# EAGLE board veter-cap (EAGLE 6.3)
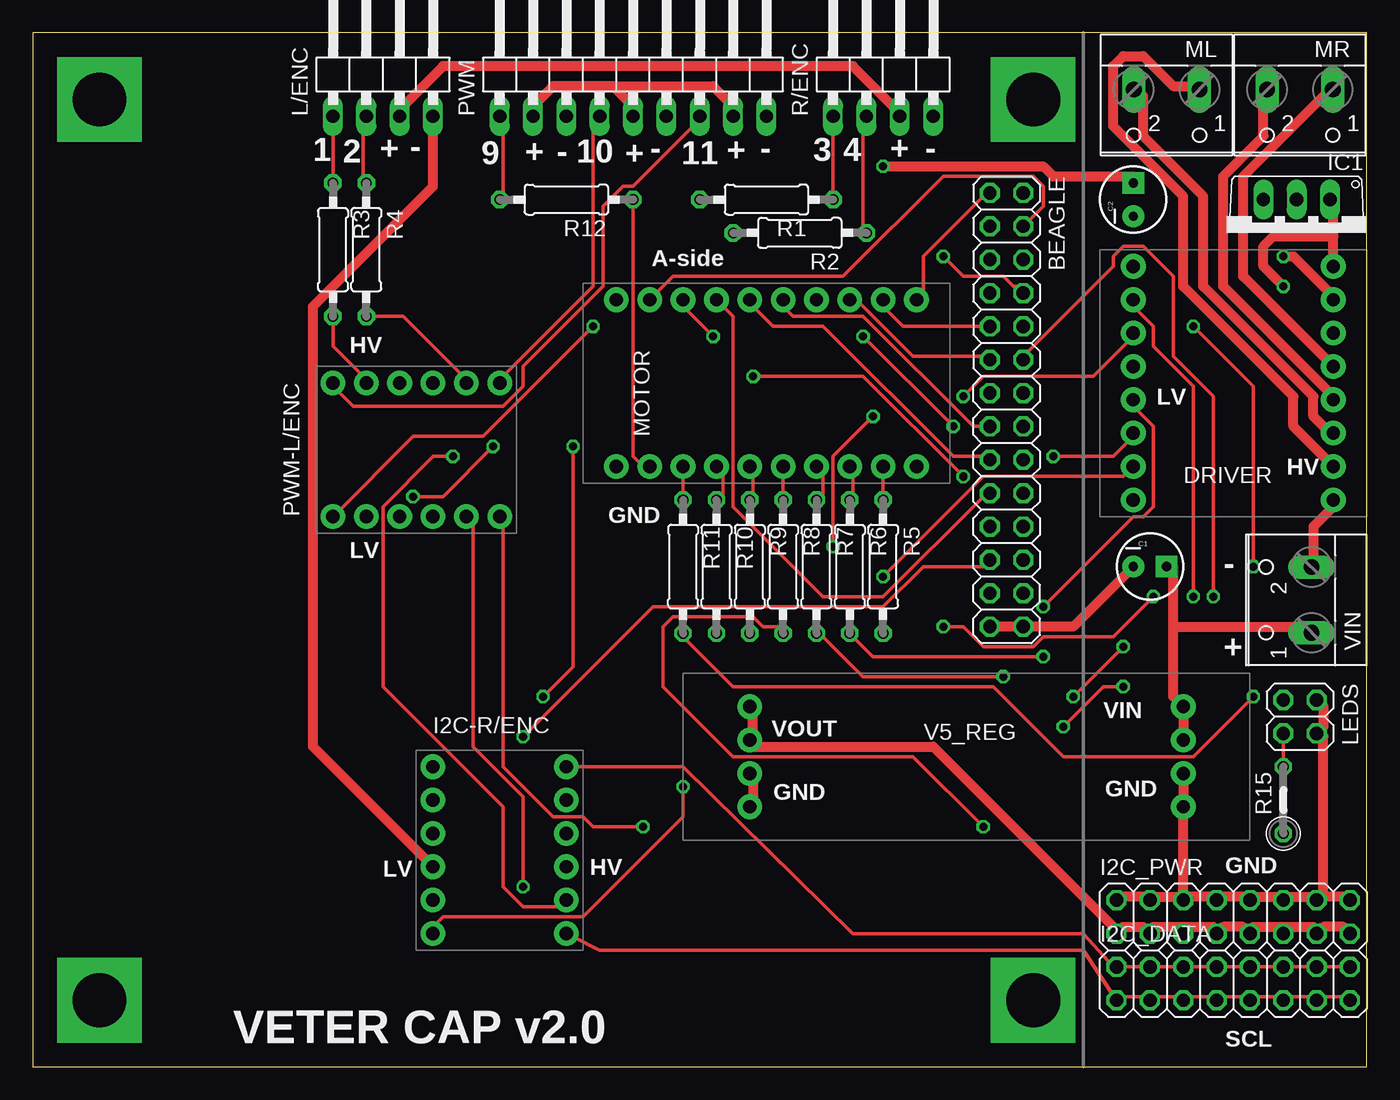
[diagram p0: board, top side]
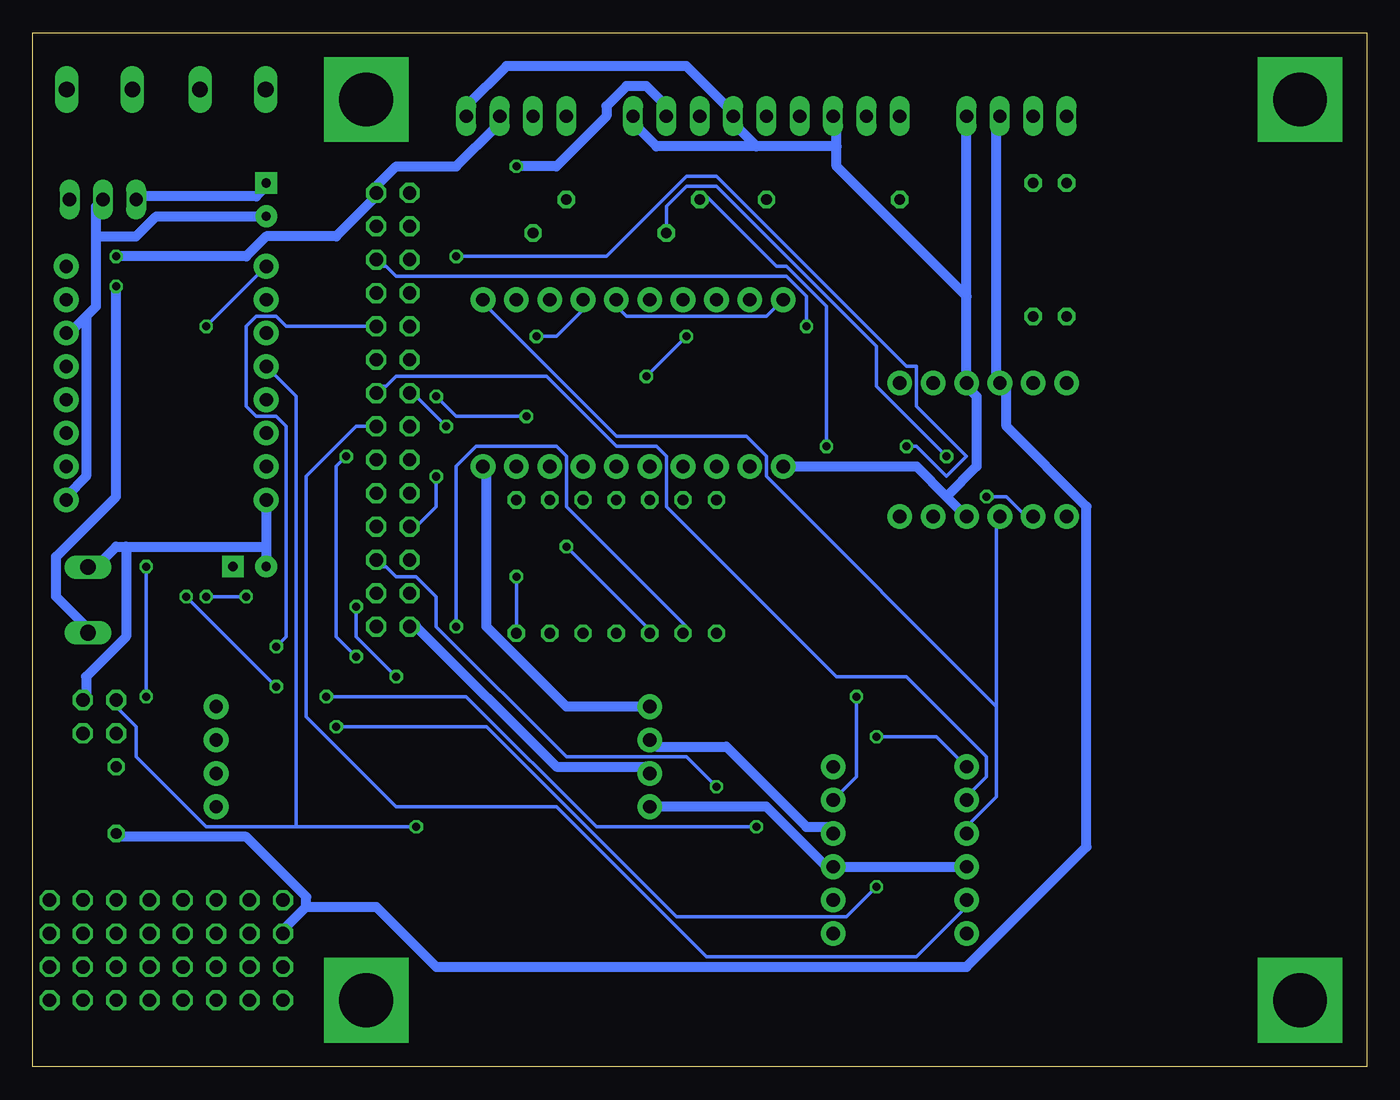
[diagram p1: board, bottom side, seen from below]

Size 101.6 x 78.74 mm. Coordinates in mm from the lower left corner, seen from the top.
Outline: 0,0 101.6,0 101.6,78.74 0,78.74 0,0
Copper layers (1*16): Top 0.035mm / dielectric 1.5mm / Bottom 0.035mm
Design rules "default": minimum track width 10mil, minimum drill 24mil, track to track 8mil, track to pad 8mil, pad to pad 8mil, via to via 8mil, smd to smd 8mil, copper to edge 40mil, drill to drill 12mil, minimum pad ring 10mil, minimum via ring 8mil, stop-mask expansion 4mil, vias tented up to drill 0mil, thermal gap 10mil
Net classes: 0 default: width 0.254 mm; 1 Supply: width 0.762 mm

## Footprints (pad centres in the part's own frame; a part is rotated, then mirrored left to right if it is on the bottom)
2X14 = drill 1.016 octagon: 1 -16.51,-1.27; 2 -16.51,1.27; 3 -13.97,-1.27; 4 -13.97,1.27; 5 -11.43,-1.27; 6 -11.43,1.27; 7 -8.89,-1.27; 8 -8.89,1.27; 9 -6.35,-1.27; 10 -6.35,1.27; 11 -3.81,-1.27; 12 -3.81,1.27; 13 -1.27,-1.27; 14 -1.27,1.27; 15 1.27,-1.27; 16 1.27,1.27; 17 3.81,-1.27; 18 3.81,1.27; 19 6.35,-1.27; 20 6.35,1.27; 21 8.89,-1.27; 22 8.89,1.27; 23 11.43,-1.27; 24 11.43,1.27; 25 13.97,-1.27; 26 13.97,1.27; 27 16.51,-1.27; 28 16.51,1.27
CPOL-RADIAL-10UF-25V = drill 0.7 pad 1.651 square: 1 1.27,0 | drill 0.7 pad 1.651: 2 -1.27,0
6612-BREAKOUT = drill 1.016 pad 1.88: 1 -7.62,-8.89; 2 -7.62,-6.35; 3 -7.62,-3.81; 4 -7.62,-1.27; 5 -7.62,1.27; 6 -7.62,3.81; 7 -7.62,6.35; 8 -7.62,8.89; 9 7.62,8.89; 10 7.62,6.35; 11 7.62,3.81; 12 7.62,1.27; 13 7.62,-1.27; 14 7.62,-3.81; 15 7.62,-6.35; 16 7.62,-8.89
BOB-08745-BREAKOUT = drill 1.016 pad 1.88: 1 -5.08,-6.35; 2 -5.08,-3.81; 3 -5.08,-1.27; 4 -5.08,1.27; 5 -5.08,3.81; 6 -5.08,6.35; 7 5.08,6.35; 8 5.08,3.81; 9 5.08,1.27; 10 5.08,-1.27; 11 5.08,-3.81; 12 5.08,-6.35
2X08 = drill 1.016 octagon: 1 -8.89,-1.27; 2 -8.89,1.27; 3 -6.35,-1.27; 4 -6.35,1.27; 5 -3.81,-1.27; 6 -3.81,1.27; 7 -1.27,-1.27; 8 -1.27,1.27; 9 1.27,-1.27; 10 1.27,1.27; 11 3.81,-1.27; 12 3.81,1.27; 13 6.35,-1.27; 14 6.35,1.27; 15 8.89,-1.27; 16 8.89,1.27
TO220V = drill 1.016 long: 1 -2.54,-2.54; 2 0,-2.54; 3 2.54,-2.54
1X04/90 = drill 1.016 long: 1 -3.81,-3.81; 2 -1.27,-3.81; 3 1.27,-3.81; 4 3.81,-3.81
2X02 = drill 1.016 octagon: 1 -1.27,-1.27; 2 -1.27,1.27; 3 1.27,-1.27; 4 1.27,1.27
BEAGLE-PAD = drill 4.1 pad 6.452 square: B4,1 0,0
W237-102 = drill 1.194 long: 1 -2.5,-1.27; 2 2.5,-1.27
TXB0108-BREAKOUT = drill 1.016 pad 1.88: 1 -6.35,-11.43; 2 -6.35,-8.89; 3 -6.35,-6.35; 4 -6.35,-3.81; 5 -6.35,-1.27; 6 -6.35,1.27; 7 -6.35,3.81; 8 -6.35,6.35; 9 -6.35,8.89; 10 -6.35,11.43; 11 6.35,11.43; 12 6.35,8.89; 13 6.35,6.35; 14 6.35,3.81; 15 6.35,1.27; 16 6.35,-1.27; 17 6.35,-3.81; 18 6.35,-6.35; 19 6.35,-8.89; 20 6.35,-11.43
1X09/90 = drill 1.016 long: 1 -10.16,-3.81; 2 -7.62,-3.81; 3 -5.08,-3.81; 4 -2.54,-3.81; 5 0,-3.81; 6 2.54,-3.81; 7 5.08,-3.81; 8 7.62,-3.81; 9 10.16,-3.81
0207/10 = drill 0.813 octagon: 1 -5.08,0; 2 5.08,0
0207/5V = drill 0.813 octagon: 1 -2.54,0; 2 2.54,0
D15V35F5S3-BREAKOUT = drill 1.016 pad 1.88: 1 -16.51,-3.81; 2 -16.51,-1.27; 3 -16.51,1.27; 4 -16.51,3.81; 5 16.51,3.81; 6 16.51,1.27; 7 16.51,-1.27; 8 16.51,-3.81

## Placement (x,y rotation side)
BEAGLE  Expansion  [2X14]  74.17,50.04 270 top
C1  100uF  [CPOL-RADIAL-10UF-25V]  85.09,38.1 0 top
C2  10uF  [CPOL-RADIAL-10UF-25V]  83.82,66.04 90 top
DRIVER  TB6612FNG  [6612-BREAKOUT]  91.44,52.07 0 top
FRAME1  FRAME-LETTER  [CREATIVE_COMMONS]  -77.47,59.69 0 top  (outside the outline)
I2C-R/ENC  BOB-08745  [BOB-08745-BREAKOUT]  35.56,16.51 0 top
I2C_DATA  [2X08]  91.44,6.35 0 top
I2C_PWR  [2X08]  91.44,11.43 0 top
IC1  7805TV  [TO220V]  96.27,63.5 180 top
L/ENC  LEFT  [1X04/90]  26.67,76.2 0 top
LEDS  5V LEDS  [2X02]  96.52,26.67 270 top
LEFT-BOTTOM  BEAGLE-PAD  [BEAGLE-PAD]  5.08,5.08 0 top
LEFT-TOP  BEAGLE-PAD  [BEAGLE-PAD]  5.08,73.66 0 top
ML  LEFT  [W237-102]  86.36,73.15 180 top
MOTOR  TXB0108  [TXB0108-BREAKOUT]  55.88,52.07 270 top
MR  RIGHT  [W237-102]  96.52,73.15 180 top
PWM  PWM  [1X09/90]  45.72,76.2 0 top
PWM-L/ENC  BOB-08745  [BOB-08745-BREAKOUT]  29.21,46.99 90 top
R1  8K2  [0207/10]  55.88,66.04 180 top
R2  8K2  [0207/10]  58.42,63.5 180 top
R3  8K2  [0207/10]  22.86,62.23 270 top
R4  8K2  [0207/10]  25.4,62.23 270 top
R5  560  [0207/10]  64.77,38.1 270 top
R6  560  [0207/10]  62.23,38.1 270 top
R7  560  [0207/10]  59.69,38.1 270 top
R8  560  [0207/10]  57.15,38.1 270 top
R9  560  [0207/10]  54.61,38.1 270 top
R10  560  [0207/10]  52.07,38.1 270 top
R11  560  [0207/10]  49.53,38.1 270 top
R12  560  [0207/10]  40.64,66.04 180 top
R15  560  [0207/5V]  95.25,20.32 90 top
R/ENC  RIGHT  [1X04/90]  64.77,76.2 0 top
RIGHT-BOTTOM  BEAGLE-PAD  [BEAGLE-PAD]  76.2,5.08 0 top
RIGHT-TOP  BEAGLE-PAD  [BEAGLE-PAD]  76.2,73.66 0 top
V5_REG  D15V35F5S3  [D15V35F5S3-BREAKOUT]  71.12,23.62 180 top
VIN  INPUT  [W237-102]  96.14,35.56 90 top

## Library data of the parts
BEAGLE I2C_DATA I2C_PWR L/ENC LEDS PWM R/ENC = pinhead
C1 C2 = SparkFun-Passives
DRIVER I2C-R/ENC LEFT-BOTTOM LEFT-TOP MOTOR PWM-L/ENC RIGHT-BOTTOM RIGHT-TOP V5_REG = veter
FRAME1 = SparkFun-Aesthetics
IC1 = linear
ML MR VIN = con-wago-500; MPN: 237-102; OC_FARNELL: unknown; OC_NEWARK: 70K9898
R1-R12 R15 = resistor

## Nets
+1V8: BEAGLE.1 I2C-R/ENC.4 MOTOR.10 PWM-L/ENC.4
+5V [Supply]: BEAGLE.2 DRIVER.10 I2C-R/ENC.9 I2C_PWR.1 I2C_PWR.3 I2C_PWR.5 I2C_PWR.7 I2C_PWR.9 I2C_PWR.11 I2C_PWR.13 I2C_PWR.15 L/ENC.3 MOTOR.11 PWM-L/ENC.9 R15.1 R/ENC.3 V5_REG.7 V5_REG.8
+5V_SERVO [Supply]: C2.1 IC1.3 PWM.2 PWM.5 PWM.8
ENC1_143: PWM-L/ENC.8 R3.2
ENC2_158: PWM-L/ENC.11 R4.2
ENC3_162: I2C-R/ENC.8 R1.2
ENC4_161: I2C-R/ENC.11 R2.2
GND [Supply]: BEAGLE.27 BEAGLE.28 C1.2 C2.2 DRIVER.1 DRIVER.11 DRIVER.16 I2C-R/ENC.3 I2C-R/ENC.10 I2C_PWR.2 I2C_PWR.4 I2C_PWR.6 I2C_PWR.8 I2C_PWR.10 I2C_PWR.12 I2C_PWR.14 I2C_PWR.16 IC1.2 L/ENC.4 LEDS.2 LEDS.4 MOTOR.20 PWM-L/ENC.3 PWM-L/ENC.10 PWM.3 PWM.6 PWM.9 R/ENC.4 V5_REG.3 V5_REG.4 V5_REG.5 V5_REG.6 VIN.2
GPIO_130: BEAGLE.21 MOTOR.3
GPIO_131: BEAGLE.19 MOTOR.4
GPIO_132: BEAGLE.17 MOTOR.5
GPIO_133: BEAGLE.15 MOTOR.1 MOTOR.6
GPIO_134: BEAGLE.13 MOTOR.7
GPIO_135: BEAGLE.11 MOTOR.8
GPIO_136: BEAGLE.9 MOTOR.9
GPIO_143: BEAGLE.8 PWM-L/ENC.5
GPIO_144: BEAGLE.4 MOTOR.2
GPIO_145: BEAGLE.10 PWM-L/ENC.1
GPIO_146: BEAGLE.6 PWM-L/ENC.6
GPIO_158: BEAGLE.12 PWM-L/ENC.2
GPIO_161: BEAGLE.16 I2C-R/ENC.2
GPIO_162: BEAGLE.14 I2C-R/ENC.5
GPIO_168: BEAGLE.24 I2C-R/ENC.1
GPIO_183: BEAGLE.23 I2C-R/ENC.6
I2C_SCL: I2C-R/ENC.12 I2C_DATA.1 I2C_DATA.3 I2C_DATA.5 I2C_DATA.7 I2C_DATA.9 I2C_DATA.11 I2C_DATA.13 I2C_DATA.15
I2C_SDA: I2C-R/ENC.7 I2C_DATA.2 I2C_DATA.4 I2C_DATA.6 I2C_DATA.8 I2C_DATA.10 I2C_DATA.12 I2C_DATA.14 I2C_DATA.16
N$1: MOTOR.12 R5.1
N$2: MOTOR.13 R6.1
N$3: MOTOR.14 R7.1
N$4: MOTOR.15 R8.1
N$5: MOTOR.16 R9.1
N$6: MOTOR.17 R10.1
N$7: MOTOR.18 R11.1
N$8 [Supply]: DRIVER.14 ML.2
N$9 [Supply]: DRIVER.15 ML.1
N$10 [Supply]: DRIVER.13 MR.2
N$11 [Supply]: DRIVER.12 MR.1
N$12: R1.1 R/ENC.1
N$13: R2.1 R/ENC.2
N$14: L/ENC.1 R3.1
N$15: L/ENC.2 R4.1
N$16: MOTOR.19 R12.1
N$17: DRIVER.2 R5.2
N$18: DRIVER.3 R6.2
N$19: DRIVER.4 R7.2
N$20: DRIVER.5 LEDS.1 R8.2
N$21: DRIVER.6 R9.2
N$22: DRIVER.7 R10.2
N$23: DRIVER.8 R11.2
N$24: LEDS.3 R15.2
PWM9: PWM.1 R12.2
PWM10: PWM-L/ENC.12 PWM.4
PWM11: PWM-L/ENC.7 PWM.7
VBAT [Supply]: C1.1 DRIVER.9 IC1.1 V5_REG.1 V5_REG.2 VIN.1

## Tracks (layer width: path | path; a pad name or v marks a point on that pad's centre or on a via)
+1V8
  Top 0.254: BEAGLE.1 72.39,66.29 67.82,61.72 67.82,58.67 MOTOR.10
  Bottom 0.254: 28.19,27.43 28.19,41.91 PWM-L/ENC.4 | 28.19,27.43 28.19,20.57 30.48,18.29 I2C-R/ENC.4 | 28.19,27.43 45.72,44.96 45.72,46.48 47.24,48.01 57.15,48.01 67.06,57.91 MOTOR.10
+5V  (via drill 0.61)
  Top 0.762: v95.25,61.72 96.01,61.72 99.06,58.67 DRIVER.10 | L/ENC.3 28.19,72.39 28.19,73.15 31.24,76.2 62.48,76.2 66.29,72.39 R/ENC.3 | I2C_PWR.15 99.82,10.67 98.3,10.67 I2C_PWR.13 97.54,10.67 95.25,10.67 | 95.25,10.67 92.96,10.67 I2C_PWR.9 92.2,10.67 90.68,10.67 I2C_PWR.7 89.92,10.67 87.63,10.67 | 95.25,10.67 I2C_PWR.11 95.25,10.67 | 87.63,10.67 85.34,10.67 I2C_PWR.3 84.58,10.67 83.06,10.67 I2C_PWR.1 82.3,10.67 68.58,24.38 54.86,24.38 V5_REG.7 54.86,25.15 54.86,27.43 V5_REG.8 | 87.63,10.67 I2C_PWR.5 87.63,10.67
  Bottom 0.762: L/ENC.3 28.19,72.39 28.19,52.58 PWM-L/ENC.9 27.43,51.82 27.43,48.77 21.34,42.67 21.34,16.76 30.48,7.62 70.87,7.62 75.44,12.19 80.77,12.19 | R/ENC.3 66.29,72.39 66.29,71.63 69.34,68.58 73.91,68.58 75.44,67.06 BEAGLE.2 75.44,66.29 78.49,63.25 83.82,63.25 85.34,61.72 v95.25,61.72 | 80.77,12.19 80.77,12.95 85.34,17.53 95.25,17.53 R15.1 | 80.77,12.19 82.3,10.67 I2C_PWR.1 | I2C-R/ENC.9 41.15,18.29 42.67,18.29 48.77,24.38 54.1,24.38 V5_REG.7 | MOTOR.11 67.06,45.72 67.06,33.53 60.96,27.43 54.86,27.43 V5_REG.8
+5V_SERVO  (via drill 0.61)
  Top 0.762: PWM.2 38.1,73.15 39.62,74.68 44.2,74.68 | 44.2,74.68 45.72,73.15 PWM.5 | PWM.8 53.34,73.15 51.82,74.68 44.2,74.68 | v64.77,68.58 76.96,68.58 77.72,67.82 83.82,67.82 C2.1
  Bottom 0.762: IC1.3 93.73,66.29 84.58,66.29 83.82,67.06 C2.1 | v64.77,68.58 61.72,68.58 57.91,72.39 57.91,73.15 56.39,74.68 54.86,74.68 53.34,73.15 PWM.8
ENC1_143
  Top 0.254: R3.2 22.86,54.86 25.15,52.58 PWM-L/ENC.8
ENC2_158
  Top 0.254: R4.2 25.91,57.15 28.19,57.15 32.77,52.58 PWM-L/ENC.11
ENC3_162  (via drill 0.61)
  Top 0.254: v41.15,47.24 41.15,30.48 v38.86,28.19
  Bottom 0.254: v41.15,47.24 41.15,57.91 44.2,60.96 44.96,60.96 50.29,66.29 R1.2 | v38.86,28.19 38.86,22.1 40.39,20.57 I2C-R/ENC.8
ENC4_161  (via drill 0.61)
  Top 0.254: v32,46.48 30.48,46.48 26.67,42.67 26.67,28.96 35.81,19.81 35.81,13.72 37.34,12.19 40.39,12.19 I2C-R/ENC.11
  Bottom 0.254: v32,46.48 37.34,51.82 37.34,54.86 49.53,67.06 51.82,67.06 53.34,65.53 53.34,64.01 R2.2
GND
  Top 0.762: V5_REG.5 54.86,19.81 54.86,22.1 V5_REG.6 | V5_REG.3 87.63,22.1 V5_REG.4 87.63,12.95 | I2C_PWR.2 83.06,12.95 84.58,12.95 I2C_PWR.4 85.34,12.95 87.63,12.95 | 87.63,12.95 I2C_PWR.6 | 87.63,12.95 I2C_PWR.6 | LEDS.2 98.3,27.43 98.3,25.91 LEDS.4 98.3,25.15 98.3,12.95 | 98.3,12.95 99.82,12.95 I2C_PWR.16 | 98.3,12.95 I2C_PWR.14 | 95.25,12.95 92.96,12.95 I2C_PWR.10 92.2,12.95 90.68,12.95 I2C_PWR.8 89.92,12.95 87.63,12.95 | 95.25,12.95 I2C_PWR.12 95.25,12.95 | 95.25,12.95 97.54,12.95 I2C_PWR.14 | 98.3,12.95 I2C_PWR.14 | 87.63,12.95 I2C_PWR.6 | BEAGLE.27 73.15,33.53 BEAGLE.28 79.25,33.53 C1.2 | VIN.2 97.54,38.1 97.54,41.15 99.06,42.67 DRIVER.16 | L/ENC.4 30.48,67.06 21.34,57.91 21.34,24.38 I2C-R/ENC.3 | 44.96,45.72 MOTOR.20 44.96,45.72 | 30.48,52.58 PWM-L/ENC.10 30.48,52.58 | 41.15,15.24 I2C-R/ENC.10 41.15,15.24
  Bottom 0.762: 32,43.43 34.29,45.72 44.2,45.72 MOTOR.20 | 32,43.43 PWM-L/ENC.3 | 30.48,58.67 30.48,52.58 PWM-L/ENC.10 30.48,51.82 29.72,51.05 29.72,45.72 32,43.43 | 30.48,58.67 L/ENC.4 | 40.39,70.1 40.39,68.58 30.48,58.67 | 40.39,70.1 40.39,72.39 PWM.3 | 48.01,72.39 48.01,71.63 46.48,70.1 | 40.39,70.1 46.48,70.1 | 48.01,72.39 PWM.6 48.01,72.39 | 46.48,70.1 54.1,70.1 55.63,71.63 55.63,72.39 PWM.9 | R/ENC.4 68.58,73.15 65.53,76.2 51.82,76.2 48.01,72.39 | I2C-R/ENC.3 40.39,15.24 I2C-R/ENC.10 41.15,15.24 45.72,19.81 54.1,19.81 V5_REG.5 | 83.82,39.62 83.82,42.67 DRIVER.1 | 83.82,39.62 C1.2 | 96.77,63.25 96.77,57.91 97.54,57.15 | 96.77,63.25 96.77,65.53 IC1.2 | 97.54,57.15 99.06,55.63 DRIVER.11 | C2.2 92.2,64.77 93.73,63.25 96.77,63.25 | 97.54,57.15 97.54,44.96 99.06,43.43 DRIVER.16 | 94.49,39.62 95.25,39.62 96.77,38.1 VIN.2 | 94.49,39.62 83.82,39.62 | 94.49,39.62 94.49,32.77 97.54,29.72 97.54,28.19 LEDS.2 | V5_REG.6 54.86,22.86 61.72,22.86 72.39,33.53 BEAGLE.27
GPIO_130  (via drill 0.61)
  Top 0.254: v70.87,44.96 63.25,52.58 v54.86,52.58 | v51.82,55.63 49.53,57.91 MOTOR.3
  Bottom 0.254: v70.87,44.96 70.87,42.67 72.39,41.15 BEAGLE.21 | v51.82,55.63 v54.86,52.58
GPIO_131
  Top 0.254: BEAGLE.19 72.39,43.43 64.77,35.81 60.2,35.81 53.34,42.67 53.34,57.15 52.58,57.91 MOTOR.4
GPIO_132
  Top 0.254: BEAGLE.17 72.39,46.48 70.1,46.48 60.2,56.39 56.39,56.39 54.86,57.91 MOTOR.5
GPIO_133
  Top 0.254: BEAGLE.15 72.39,48.77 71.63,48.77 63.25,57.15 57.91,57.15 57.15,57.91 MOTOR.6
  Bottom 0.254: MOTOR.1 44.96,57.91 45.72,57.15 56.39,57.15 57.15,57.91 MOTOR.6
GPIO_134  (via drill 0.61)
  Top 0.254: v63.25,55.63 v70.1,48.77
  Bottom 0.254: v70.1,48.77 72.39,51.05 BEAGLE.13 | v63.25,55.63 61.72,55.63 59.44,57.91 MOTOR.7
GPIO_135
  Top 0.254: BEAGLE.11 72.39,54.1 67.06,54.1 62.48,58.67 MOTOR.8
GPIO_136
  Top 0.254: BEAGLE.9 72.39,56.39 66.29,56.39 64.77,57.91 MOTOR.9
GPIO_143  (via drill 0.61)
  Top 0.254: v69.34,61.72 70.87,60.2 73.91,60.2 74.68,59.44 75.44,59.44 BEAGLE.8 | v35.05,47.24 31.24,43.43 v28.96,43.43
  Bottom 0.254: v69.34,61.72 57.91,61.72 51.82,67.82 49.53,67.82 35.05,53.34 34.29,53.34 34.29,50.29 30.48,46.48 32,44.96 34.29,47.24 v35.05,47.24 | v28.96,43.43 27.43,43.43 25.91,41.91 PWM-L/ENC.5
GPIO_144
  Top 0.254: BEAGLE.4 76.96,65.53 76.96,67.06 76.2,67.82 69.34,67.82 61.72,60.2 48.77,60.2 47.24,58.67 MOTOR.2
GPIO_145  (via drill 0.61)
  Top 0.254: v79.25,28.19 v83.06,32 | v46.48,18.29 42.67,18.29 41.91,19.05 39.62,19.05 35.81,22.86 35.81,41.91 PWM-L/ENC.1
  Bottom 0.254: BEAGLE.10 82.3,56.39 83.06,57.15 84.58,57.15 85.34,56.39 85.34,50.29 84.58,49.53 83.06,49.53 82.3,48.77 82.3,32.77 v83.06,32 | v79.25,28.19 68.58,28.19 58.67,18.29 v46.48,18.29
GPIO_146  (via drill 0.61)
  Top 0.254: v42.67,56.39 34.29,48.01 28.96,48.01 PWM-L/ENC.6
  Bottom 0.254: v42.67,56.39 42.67,58.67 44.2,60.2 73.91,60.2 74.68,60.96 75.44,60.96 BEAGLE.6
GPIO_158  (via drill 0.61)
  Top 0.254: v89.92,35.81 89.92,51.05 86.87,54.1 86.87,60.2 84.58,62.48 83.06,62.48 82.3,61.72 82.3,60.96 75.44,54.1 BEAGLE.12 | v83.06,28.96 81.53,28.96 v78.49,25.91 | v37.34,13.72 37.34,20.57 33.53,24.38 33.53,41.91 PWM-L/ENC.2
  Bottom 0.254: v83.06,28.96 v89.92,35.81 | v78.49,25.91 67.06,25.91 52.58,11.43 39.62,11.43 v37.34,13.72
GPIO_161
  Bottom 0.254: BEAGLE.16 76.96,48.77 80.77,44.96 80.77,26.67 73.91,19.81 61.72,19.81 50.29,8.38 34.29,8.38 30.48,12.19 I2C-R/ENC.2
GPIO_162
  Bottom 0.254: BEAGLE.14 75.44,51.82 74.68,51.82 73.91,52.58 62.48,52.58 57.15,47.24 54.1,47.24 53.34,46.48 53.34,42.67 40.39,29.72 35.05,29.72 28.96,23.62 28.96,22.1 30.48,20.57 I2C-R/ENC.5
GPIO_168  (via drill 0.61)
  Top 0.254: v49.53,21.34 49.53,19.05 41.91,11.43 31.24,11.43 30.48,10.67 I2C-R/ENC.1
  Bottom 0.254: v49.53,21.34 51.82,23.62 60.96,23.62 70.87,33.53 70.87,35.81 72.39,37.34 73.91,37.34 74.68,38.1 75.44,38.1 BEAGLE.24
GPIO_183  (via drill 0.61)
  Top 0.254: v37.34,25.15 47.24,35.05 64.77,35.05 67.82,38.1 72.39,38.1 BEAGLE.23
  Bottom 0.254: v37.34,25.15 32.77,25.15 I2C-R/ENC.6
I2C_SCL
  Top 0.254: I2C_DATA.15 99.82,5.33 98.3,5.33 I2C_DATA.13 97.54,5.33 95.25,5.33 | 95.25,5.33 92.96,5.33 I2C_DATA.9 92.2,5.33 90.68,5.33 I2C_DATA.7 89.92,5.33 87.63,5.33 | 95.25,5.33 I2C_DATA.11 95.25,5.33 | 87.63,5.33 85.34,5.33 I2C_DATA.3 84.58,5.33 83.06,5.33 I2C_DATA.1 80.01,8.89 67.82,8.89 57.91,8.89 43.18,8.89 41.15,9.91 I2C-R/ENC.12 | 87.63,5.33 I2C_DATA.5 87.63,5.33
I2C_SDA
  Top 0.254: I2C_DATA.16 99.82,7.62 98.3,7.62 I2C_DATA.14 97.54,7.62 I2C_DATA.12 92.96,7.62 I2C_DATA.10 92.2,7.62 90.68,7.62 I2C_DATA.8 89.92,7.62 I2C_DATA.6 85.34,7.62 I2C_DATA.4 84.58,7.62 83.06,7.62 I2C_DATA.2 82.3,7.62 80.01,10.16 62.48,10.16 49.53,22.86 41.15,22.86 I2C-R/ENC.7
N$1
  Top 0.254: MOTOR.12 64.77,43.43 R5.1
N$2
  Top 0.254: R6.1 62.48,43.43 62.48,45.72 MOTOR.13
N$3
  Top 0.254: R7.1 60.2,43.43 60.2,45.72 MOTOR.14
N$4
  Top 0.254: MOTOR.15 57.15,43.43 R8.1
N$5
  Top 0.254: R9.1 54.86,43.43 54.86,45.72 MOTOR.16
N$6
  Top 0.254: R10.1 52.58,43.43 52.58,45.72 MOTOR.17
N$7
  Top 0.254: MOTOR.18 49.53,43.43 R11.1
N$8
  Top 0.762: ML.2 84.58,73.91 84.58,70.87 89.15,66.29 89.15,59.44 97.54,51.05 97.54,49.53 99.06,48.01 DRIVER.14
N$9
  Top 0.762: DRIVER.15 96.01,48.77 96.01,51.05 87.63,59.44 87.63,66.29 82.3,71.63 82.3,76.2 83.06,76.96 84.58,76.96 86.87,74.68 88.39,74.68 ML.1
N$10
  Top 0.762: MR.2 93.73,73.91 93.73,70.87 90.68,67.82 90.68,59.44 99.06,51.05 DRIVER.13
N$11
  Top 0.762: DRIVER.12 92.2,60.2 92.2,67.82 98.3,73.91 MR.1
N$12
  Top 0.254: R/ENC.1 60.96,66.29 R1.1
N$13
  Top 0.254: R2.1 63.25,64.01 63.25,72.39 R/ENC.2
N$14
  Top 0.254: L/ENC.1 22.86,67.82 R3.1
N$15
  Top 0.254: R4.1 25.15,67.82 25.15,72.39 L/ENC.2
N$16
  Top 0.254: R12.1 45.72,65.53 45.72,46.48 46.48,45.72 MOTOR.19
N$17  (via drill 0.61)
  Top 0.254: v64.77,37.34 72.39,44.96 83.06,44.96 DRIVER.2
  Bottom 0.254: v64.77,37.34 64.77,33.53 R5.2
N$18  (via drill 0.61)
  Top 0.254: v76.96,31.24 64.01,31.24 62.48,32.77 R6.2 | v77.72,46.48 82.3,46.48 83.82,48.01 DRIVER.3
  Bottom 0.254: v76.96,31.24 78.49,32.77 78.49,45.72 v77.72,46.48
N$19  (via drill 0.61)
  Top 0.254: v73.91,29.72 63.25,29.72 60.2,32.77 R7.2 | v76.96,35.05 83.82,41.91 84.58,41.91 85.34,42.67 85.34,48.77 83.82,50.29 DRIVER.4
  Bottom 0.254: v73.91,29.72 76.96,32.77 v76.96,35.05
N$20  (via drill 0.61)
  Top 0.254: v72.39,18.29 67.06,23.62 53.34,23.62 48.01,28.96 48.01,33.53 48.77,34.29 54.86,34.29 55.63,33.53 57.15,33.53 R8.2
  Bottom 0.254: 81.53,18.29 88.39,18.29 93.73,23.62 93.73,25.91 95.25,27.43 LEDS.1 | 81.53,18.29 v72.39,18.29 | DRIVER.5 81.53,51.05 81.53,18.29
N$21  (via drill 0.61)
  Top 0.254: v60.96,39.62 60.96,46.48 v64.01,49.53 | v70.87,51.05 72.39,52.58 80.77,52.58 83.82,55.63 DRIVER.6
  Bottom 0.254: v60.96,39.62 54.86,33.53 R9.2 | v64.01,49.53 69.34,49.53 v70.87,51.05
N$22  (via drill 0.61)
  Top 0.254: v69.34,33.53 70.87,33.53 72.39,32 76.2,32 76.96,32.77 82.3,32.77 v85.34,35.81 | v88.39,35.81 88.39,51.82 85.34,54.86 85.34,56.39 83.82,57.91 DRIVER.7
  Bottom 0.254: v69.34,33.53 69.34,45.72 67.82,47.24 61.72,47.24 60.96,46.48 60.96,42.67 51.82,33.53 R10.2 | v88.39,35.81 v85.34,35.81
N$23  (via drill 0.61)
  Top 0.254: v92.96,28.19 88.39,23.62 78.49,23.62 73.15,28.96 53.34,28.96 49.53,32.77 R11.2 | v92.96,38.1 92.96,51.82 v88.39,56.39
  Bottom 0.254: v92.96,38.1 v92.96,28.19 | DRIVER.8 v88.39,56.39
N$24
  Top 0.254: R15.2 95.25,25.15 LEDS.3
PWM9
  Top 0.254: R12.2 35.81,66.29 35.81,72.39 PWM.1
PWM10
  Top 0.254: PWM.4 42.67,72.39 42.67,59.44 35.81,52.58 PWM-L/ENC.12
PWM11
  Top 0.254: PWM.7 50.29,72.39 50.29,71.63 45.72,67.06 44.96,67.06 43.43,65.53 43.43,59.44 37.34,53.34 37.34,51.82 35.81,50.29 24.38,50.29 22.86,51.82 PWM-L/ENC.7
VBAT  (via drill 0.61)
  Top 0.762: DRIVER.9 99.06,63.25 | 99.06,63.25 99.06,65.53 IC1.1 | 86.87,33.53 86.87,28.19 V5_REG.1 87.63,25.15 V5_REG.2 | 86.87,33.53 86.87,38.1 C1.1 | 86.87,33.53 96.77,33.53 VIN.1 | 99.06,63.25 94.49,63.25 93.73,62.48 93.73,60.96 v95.25,59.44
  Bottom 0.762: v95.25,59.44 95.25,43.43 99.82,38.86 99.82,35.81 97.54,33.53 VIN.1

## Text on the board
tNames: 1 | 2 | + | - | 9 | + | - | 10 | + | - | 11 | + | - | 3 | 4 | + | - | A-side | HV | LV | HV | GND | LV | - | + | VIN | VOUT | GND | GND | HV | GND | LV | VETER CAP v2.0 | SCL
bDocu: +